# Altium PCB Power.PcbDoc
Units mm, origin at the board's own origin, x right, y up, seen from the top; angles counter-clockwise.
Board outline 90 x 50 mm, 2 copper layers (Top Layer, Bottom Layer); 12 components, 3 nets, 18 pads, 0 vias.
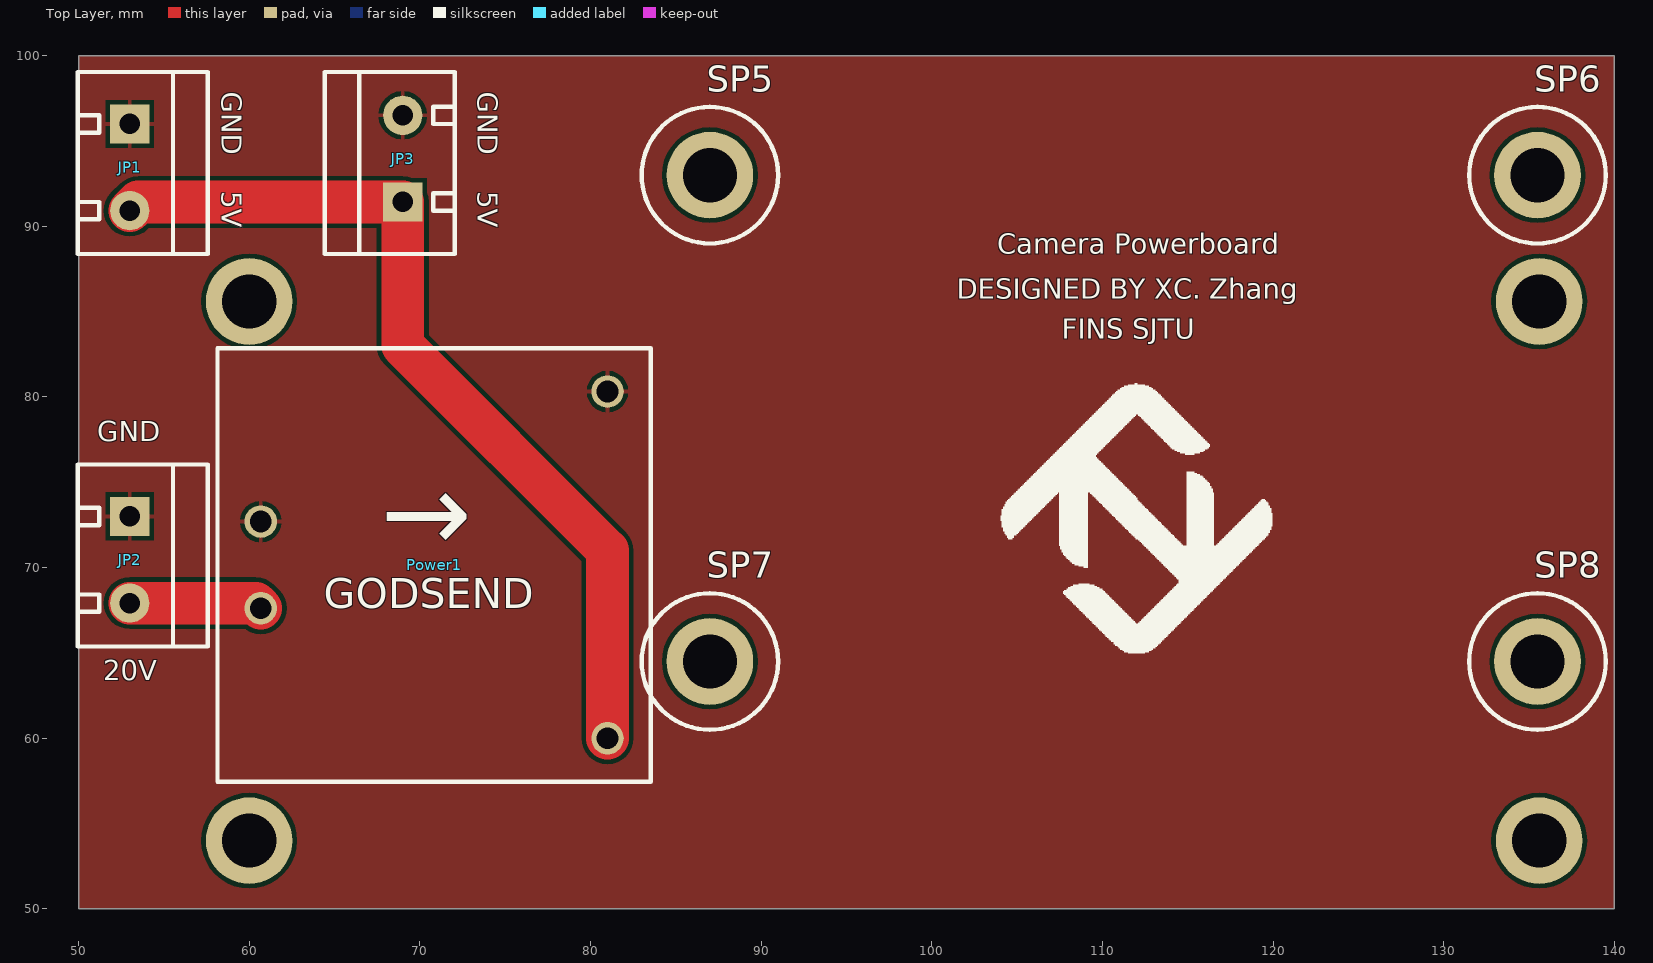
[diagram p0: Top Layer view]
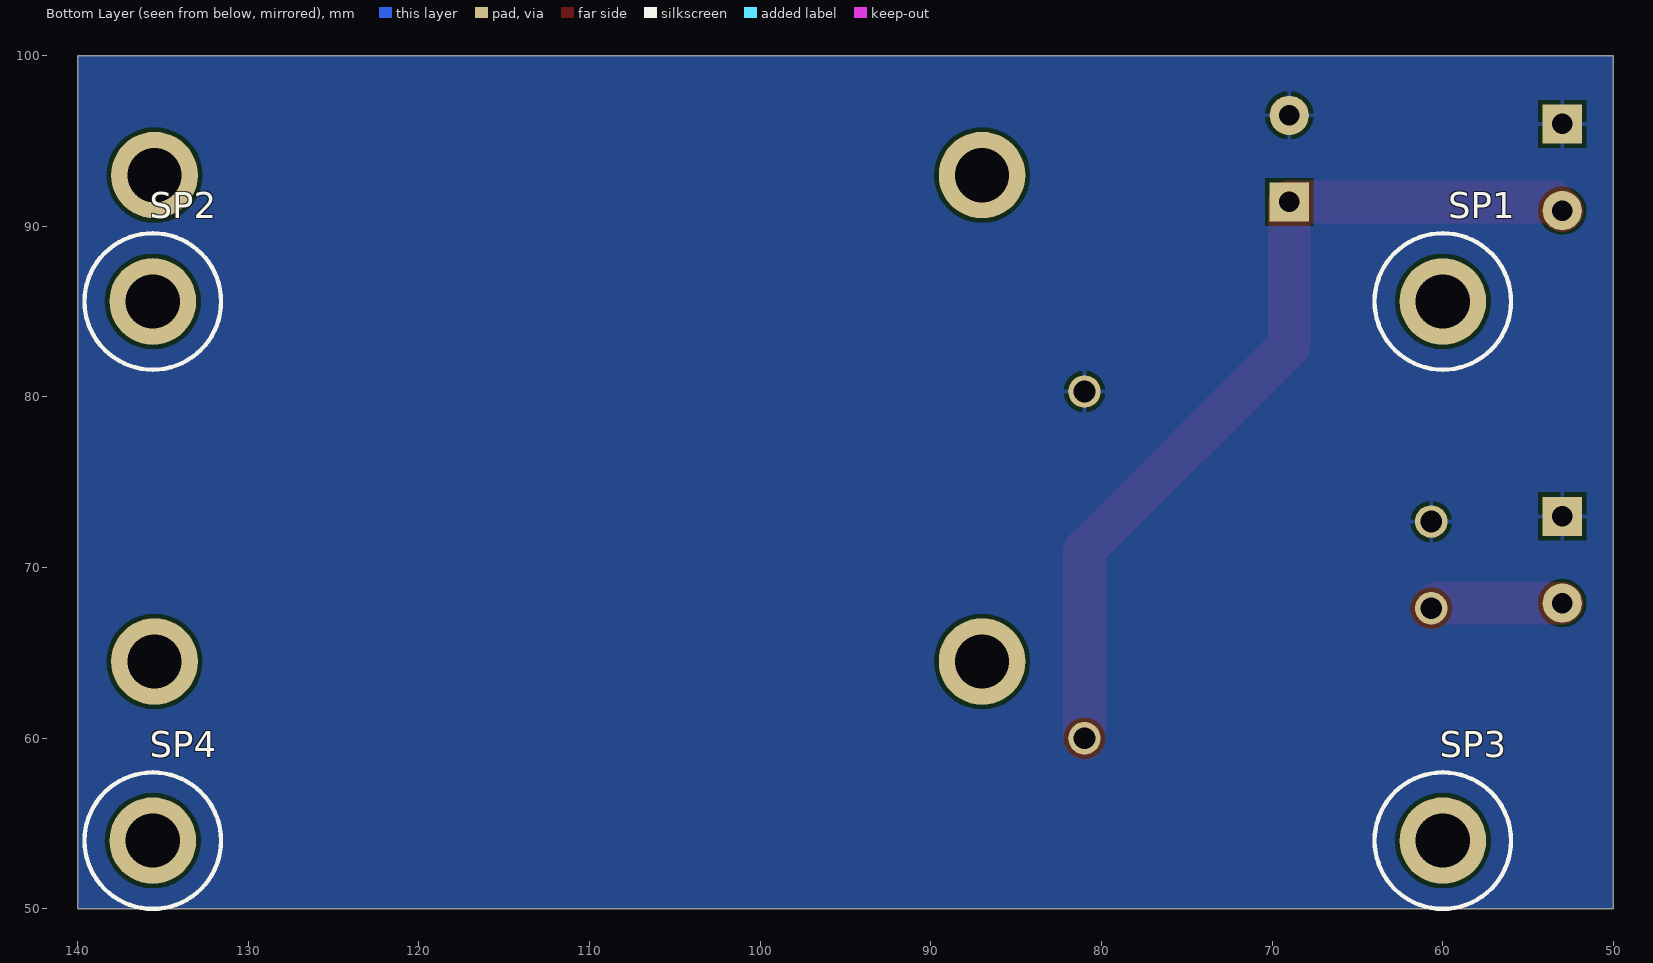
[diagram p1: Bottom Layer view, seen from below]

## Layer stack, top to bottom
Top Solder: solder mask 0.0102, Solder Resist, Dk 3.5
Top Layer: signal copper 0.0356
Dielectric 1: dielectric 0.32, FR-4, Dk 4.8
Bottom Layer: signal copper 0.0356
Bottom Solder: solder mask 0.0102, Solder Resist, Dk 3.5

## Board outline
50,50 140,50 140,100 50,100

## Design rules (kind name [scope] priority, off if disabled: settings)
Clearance [All] p1: gap=0.254 ignorepadtopadclearanceinfootprint=FALSE except(0: Arc-Hole Track-Hole SMDPad-Hole THPad-Hole Via-Hole Fill-Hole Poly-Hole Region-Hole Text-Hole)
PolygonConnect [All] p1: connectstyle=Relief reliefconductorwidth=0.254 reliefentries=4 polygonreliefangle="90 Angle" airgapwidth=0.254
RoutingVias [All] p1: holewidth=0.711 width=1.27 viastyle="Through Hole" minholewidth=0.711 minwidth=1.27 maxholewidth=0.711 maxwidth=1.27
SolderMaskExpansion [All] p1: expansion=0.102 istentingtop=FALSE
Width [All] p1: maxlimit=5 minlimit=0.254 preferedwidth=2.5 minimp=50.000000 maximp=50.000000 favimp=50.000000
30 further rules are at their usual default settings.

## Components (designator, comment, footprint, x,y, rotation, side; value= is the part's Value field where it differs from the comment)
JP1 "HDR-1X2" KF301-5.0-2P 53,90.92 r270 top
JP2 "HDR-1X2" KF301-5.0-2P 53,67.92 r270 top
JP3 "HDR-1X2" KF301-5.0-2P 69,96.508 r90 top
Power1 "GODSEND" GODSEND 58.14,57.46 r0 top
SP1 "M3铜柱" M3x10_L 60,85.6 r180 bottom
SP2 "M3铜柱" M3x10_L 135.6,85.6 r180 bottom
SP3 "M3铜柱" M3x10_L 60,54 r180 bottom
SP4 "M3铜柱" M3x10_L 135.6,54 r180 bottom
SP5 "M3铜柱" M3x10_L 87,93 r0 top
SP6 "M3铜柱" M3x10_L 135.5,93 r0 top
SP7 "M3铜柱" M3x10_L 87,64.5 r0 top
SP8 "M3铜柱" M3x10_L 135.5,64.5 r0 top

## Footprints (in the part's own frame and the unit in brackets; to place one, negate y for a bottom-side part, rotate by r counter-clockwise, add the part's x,y. Pads: shape width x height; smd on the part's side, far side on the other; paste and mask are expansions set on the pad)
GODSEND [mm]
  round 1.905 hole 1.27: 1(2.54,15.24) 2(2.54,10.16) 3(22.86,22.86) 4(22.86,2.54)
  silkscreen extent 0,0 25.4,25.4
KF301-5.0-2P [mm] "可拼接端子/6A"
  rect 2.3x2.3 hole 1.2: 1(-5.08,0)
  round 2.3 hole 1.2: 2(0,0)
  silkscreen extent -8.13,-3.05 2.54,4.57, body extent -7.95,-3 2.55,4.6, height 10.05
M3x10_L [mm] "M3铜柱，长：10mm"
  round 5.08 hole 3.175: 1(0,0)
  silkscreen extent -4,-4 4,4, body extent -2.7,-2.35 2.7,2.35, height 10.05

## Part data
JP1 JP2 JP3: library part "Header 2", "2P接插件", BOM名称=2P接插件, 学习资源=www.ooocke.com, 版权归属=源创客
SP1 SP2 SP3 SP4 SP5 SP6 SP7 SP8: library part 铜柱小焊盘, "铜柱", BOM名称=铜柱, 学习资源=www.ooocke.com, 版权归属=源创客

## Nets (pads, with @x,y where several pads share a name; then routed paths per layer and width w, separated by ;. In a path a pad name is that pad's centre, name@x,y a point inside that pad or via, vN(x,y) a via of type N, cw(c..) or ccw(c..) an arc to the next point about the centre after c; other vN are vias at no path point)
+5: JP1.2 JP3.1 Power1.4 | length 52.6
  Top Layer w2.5: JP1.2 53.508,91.428 JP3.1 69,83 81,71 Power1.4
+20: JP2.2 Power1.2 | length 7.8
  Top Layer w2.5: JP2.2 60.38,67.92 Power1.2
GND: JP1.1 JP2.1 JP3.2 Power1.1 Power1.3
pads on no net: SP1.1 SP2.1 SP3.1 SP4.1 SP5.1 SP6.1 SP7.1 SP8.1

## Polygon pours and split planes (outlines as drawn)
GND on Top Layer "GND_L01_P000" (solid, pour order 0): 50,50 140,50 140,100 50,100
GND on Bottom Layer "GND_L02_P001" (solid, pour order 1): 50,50 140,50 140,100 50,100

## Silkscreen, mask and mechanical layers (free items; w line width, h text height)
Top Overlay:
  drawing of 457 lines, arcs and shapes, not listed
  text "GND" at 58.022,97.894 h2 r270
  text "GND" at 73.022,97.894 h2 r270
  text "5V" at 58.022,92.051 h2 r270
  text "5V" at 73.022,92.051 h2 r270
  text "Camera Powerboard" at 103.848,88.022 h2
  text "DESIGNED BY XC. Zhang" at 101.481,85.376 h2
  text "FINS SJTU" at 107.618,83.022 h2
  text "GND" at 51.106,77.022 h2
  text "→" at 67.697,69.452 h8
  text "GODSEND" at 64.357,67.033 h3
  text "20V" at 51.438,63.022 h2
Mechanical 1:
  the board outline again, w0.254